# EAGLE board 8x LCD interface (EAGLE 5.01)
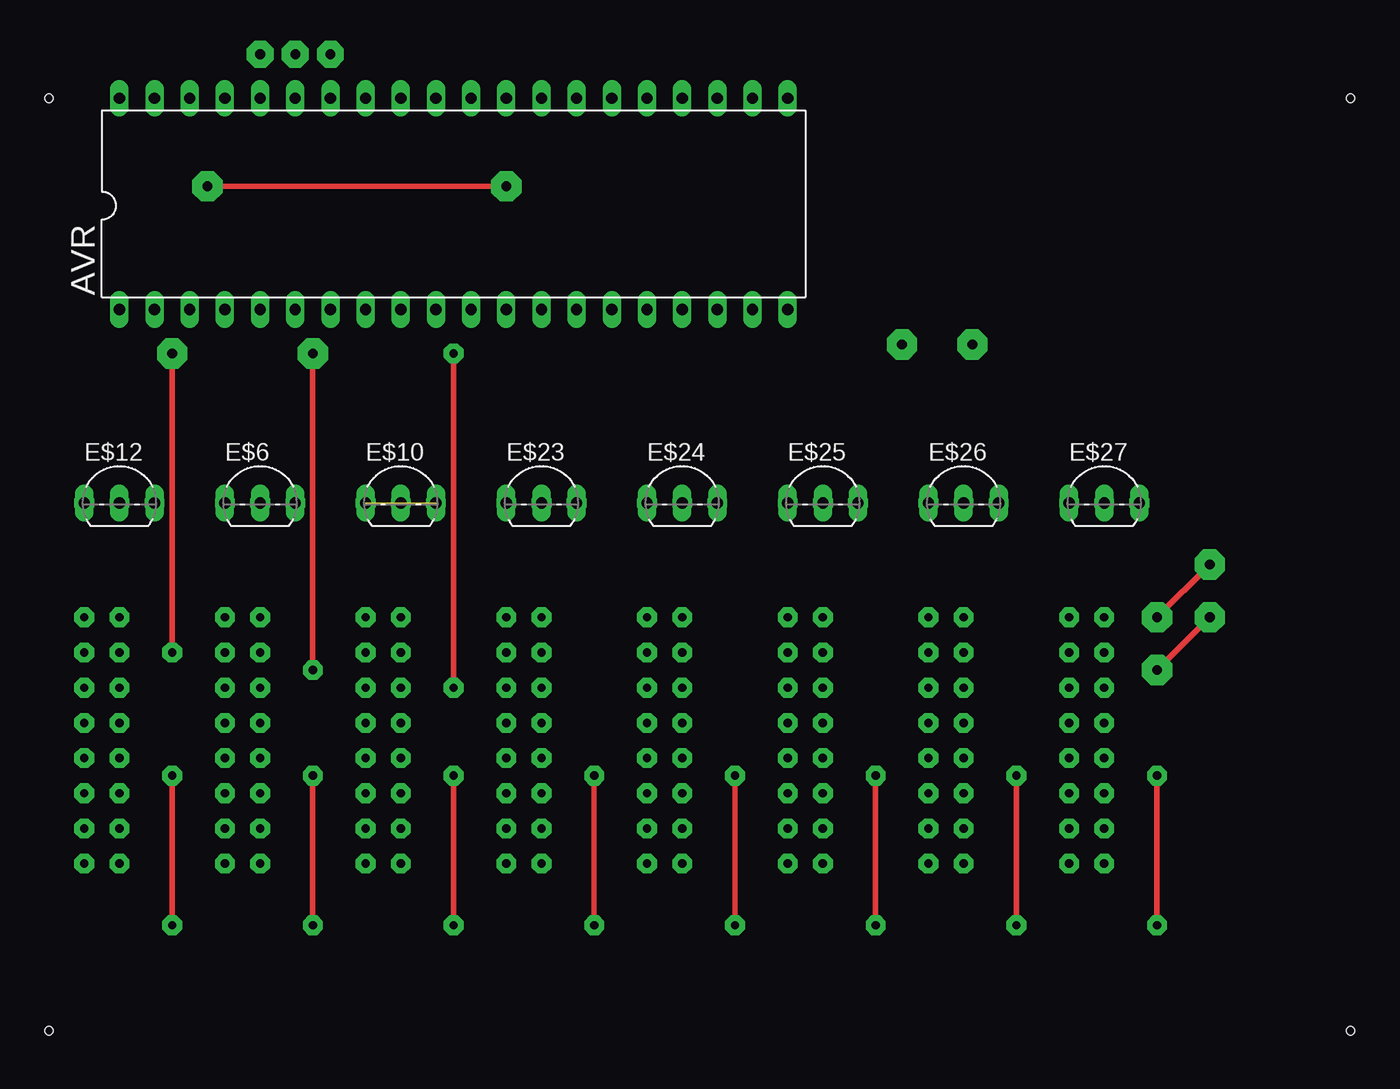
[diagram p0: board, top side]
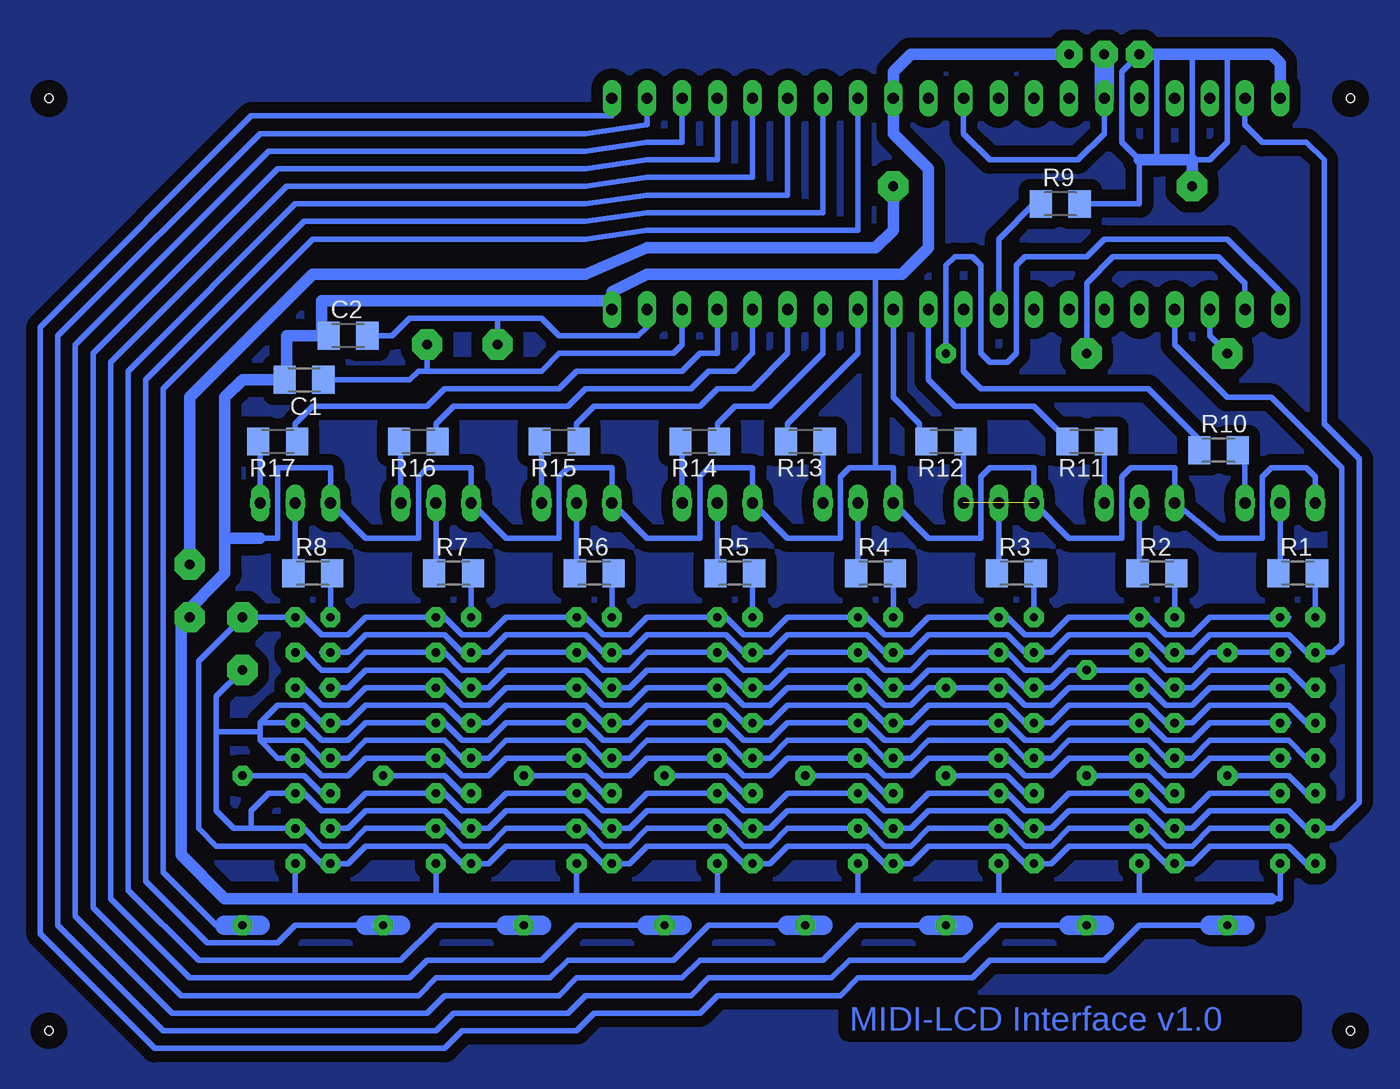
[diagram p1: board, bottom side, seen from below]

No outline drawn. Coordinates in mm, seen from the top.
Copper layers (1*16): Top 0.035mm / dielectric 1.5mm / Bottom 0.035mm
Design rules "default": minimum track width 10mil, minimum drill 24mil, track to track 32mil, track to pad 32mil, pad to pad 32mil, via to via 32mil, smd to smd 32mil, copper to edge 40mil, drill to drill 8mil, minimum pad ring 10mil, minimum via ring 8mil, stop-mask expansion 4mil, vias tented up to drill 0mil, thermal gap 10mil
Holes 0.6 mm at 0,-9.53 93.98,-9.53 93.98,57.78 0,57.78

## Footprints (pad centres in the part's own frame; a part is rotated, then mirrored left to right if it is on the bottom)
DIL40 = drill 0.813 long: 1 -24.13,-7.62; 2 -21.59,-7.62; 3 -19.05,-7.62; 4 -16.51,-7.62; 5 -13.97,-7.62; 6 -11.43,-7.62; 7 -8.89,-7.62; 8 -6.35,-7.62; 9 -3.81,-7.62; 10 -1.27,-7.62; 11 1.27,-7.62; 12 3.81,-7.62; 13 6.35,-7.62; 14 8.89,-7.62; 15 11.43,-7.62; 16 13.97,-7.62; 17 16.51,-7.62; 18 19.05,-7.62; 19 21.59,-7.62; 20 24.13,-7.62; 21 24.13,7.62; 22 21.59,7.62; 23 19.05,7.62; 24 16.51,7.62; 25 13.97,7.62; 26 11.43,7.62; 27 8.89,7.62; 28 6.35,7.62; 29 3.81,7.62; 30 1.27,7.62; 31 -1.27,7.62; 32 -3.81,7.62; 33 -6.35,7.62; 34 -8.89,7.62; 35 -11.43,7.62; 36 -13.97,7.62; 37 -16.51,7.62; 38 -19.05,7.62; 39 -21.59,7.62; 40 -24.13,7.62
M3216 = smd 1.6 x 2: 1 -1.4,0; 2 1.4,0
TO92- = drill 0.813 long: 1 2.54,0; 2 0,0; 3 -2.54,0

## Placement (x,y rotation side)
AVR  8515  [DIL40]  29.21,50.16 0 top
C1  22p  [M3216]  75.56,37.47 180 bottom
C2  22p  [M3216]  72.39,40.64 0 bottom
E$6  [TO92-]  15.24,28.57 0 top
E$10  [TO92-]  25.4,28.57 0 top
E$12  [TO92-]  5.08,28.57 0 top
E$23  [TO92-]  35.56,28.57 0 top
E$24  [TO92-]  45.72,28.57 0 top
E$25  [TO92-]  55.88,28.57 0 top
E$26  [TO92-]  66.04,28.57 0 top
E$27  [TO92-]  76.2,28.57 0 top
R1  150  [M3216]  3.81,23.5 0 bottom
R2  150  [M3216]  13.97,23.5 0 bottom
R3  150  [M3216]  24.13,23.5 0 bottom
R4  150  [M3216]  34.29,23.5 0 bottom
R5  150  [M3216]  44.45,23.5 0 bottom
R6  150  [M3216]  54.61,23.5 0 bottom
R7  150  [M3216]  64.77,23.5 0 bottom
R8  150  [M3216]  74.93,23.5 0 bottom
R9  10k  [M3216]  20.95,50.16 0 bottom
R10  470  [M3216]  9.53,32.38 0 bottom
R11  470  [M3216]  19.05,33.02 180 bottom
R12  470  [M3216]  29.21,33.02 180 bottom
R13  470  [M3216]  39.37,33.02 180 bottom
R14  470  [M3216]  46.99,33.02 180 bottom
R15  470  [M3216]  57.15,33.02 180 bottom
R16  470  [M3216]  67.31,33.02 180 bottom
R17  470  [M3216]  77.47,33.02 180 bottom

## Library data of the parts
AVR = 40xx
C1 C2 R1-R17 = rcl
E$6 E$10 E$12 E$23-E$27 = transistor-npn

## Nets
S$1: AVR.9
S$2: AVR.10
S$3: AVR.11
S$4: AVR.19
S$5: AVR.12
S$6: AVR.1
S$7: AVR.2
S$8: AVR.13
S$10: AVR.35
S$11: AVR.18
S$15: AVR.3
S$18: AVR.14
S$19: AVR.20
S$27: AVR.23
S$28: AVR.40
S$29: AVR.15
S$30: AVR.31
S$31: AVR.16
S$32: AVR.17
S$37: AVR.21
S$41: AVR.25
S$42: AVR.24
S$43: AVR.4
S$44: AVR.26
S$48: AVR.28
S$114: AVR.27
S$141: AVR.39

## Tracks (layer width: path | path; a pad name or v marks a point on that pad's centre or on a via)
S$1
  Bottom 0.406: AVR.9 25.4,47.62 22.86,50.16
S$2
  Bottom 0.406: AVR.10 27.94,38.1 26.67,36.83 14.61,36.83 10.79,33.02
S$3
  Bottom 0.406: AVR.11 30.48,37.47 28.57,35.56 22.86,35.56 20.95,33.66
S$4  (via drill 0.7 pad 2.18)
  Bottom 0.406: 61.59,41.91 v61.59,40.01 | 61.59,41.91 58.42,41.91 57.15,40.64 51.44,40.64 50.8,41.27 AVR.19 | 61.59,41.91 67.94,41.91 69.22,40.64 70.48,40.64
S$5
  Bottom 0.406: AVR.12 33.02,36.2 31.11,34.29 31.11,33.66 30.48,33.02
S$6  (via drill 0.6 pad 1.42)
  Top 0.406: v29.21,15.24 v29.21,39.37
  Bottom 0.406: v76.2,15.24 75.56,15.24 74.3,13.97 72.39,13.97 71.12,15.24 v66.04,15.24 65.41,15.24 64.14,13.97 62.23,13.97 60.96,15.24 v55.88,15.24 55.24,15.24 53.98,13.97 52.07,13.97 50.8,15.24 v45.72,15.24 45.09,15.24 43.81,13.97 41.91,13.97 40.64,15.24 34.92,15.24 33.66,13.97 31.75,13.97 30.48,15.24 v29.21,15.24 v25.4,15.24 24.77,15.24 23.5,13.97 21.59,13.97 20.32,15.24 v15.24,15.24 14.61,15.24 13.34,13.97 11.43,13.97 10.16,15.24 v5.08,15.24 4.45,15.24 | v29.21,39.37 29.21,45.72 28.57,46.35 27.3,46.35 26.67,45.72 26.67,39.37 26.04,38.73 24.77,38.73 24.13,39.37 24.13,45.72 23.5,46.35 19.05,46.35 17.78,47.62 8.89,47.62 5.08,43.81 AVR.1
S$7  (via drill 0.6 pad 1.42, 0.7 pad 2.18)
  Top 0.406: v19.05,16.51 v19.05,39.37
  Bottom 0.406: v19.05,39.37 19.05,44.45 17.14,46.35 9.53,46.35 7.62,44.45 AVR.2 | 74.3,15.24 v73.66,15.24 72.39,15.24 71.12,16.51 65.41,16.51 64.14,15.24 v63.5,15.24 62.23,15.24 60.96,16.51 55.24,16.51 53.98,15.24 v53.34,15.24 52.07,15.24 50.8,16.51 45.09,16.51 43.81,15.24 v43.18,15.24 41.91,15.24 40.64,16.51 34.92,16.51 33.66,15.24 v33.02,15.24 31.75,15.24 30.48,16.51 24.77,16.51 23.5,15.24 v22.86,15.24 21.59,15.24 20.32,16.51 v19.05,16.51 14.61,16.51 13.34,15.24 v12.7,15.24 11.43,15.24 10.16,16.51 4.45,16.51 3.17,15.24 v2.54,15.24
S$8
  Bottom 0.406: AVR.13 35.56,39.37 40.64,34.29 40.64,33.02
S$9
  pour Bottom: -16.51,69.22 106.05,69.22 106.05,-21.59 -16.51,-21.59
S$10  (via drill 0.7 pad 1.93)
  Bottom 0.813: AVR.35 v17.78,60.96
  Bottom 1.422: AVR.35 v17.78,60.96
S$11  (via drill 0.7 pad 2.18)
  Bottom 0.406: AVR.18 48.26,40.01 48.9,39.37 57.15,39.37 58.42,38.1 66.67,38.1 | 66.67,38.1 v66.67,40.01 | 74.3,37.47 67.94,37.47 67.31,38.1 66.67,38.1
S$12  (via drill 0.6 pad 1.42)
  Top 0.406: v19.05,-1.91 v19.05,8.89
  Bottom 0.406: 50.8,57.78 50.8,55.88 55.24,55.24 78.74,55.24 93.34,40.64 93.34,-1.91 85.72,-9.53 66.04,-9.53 64.77,-8.26 56.52,-8.26 55.24,-6.99 47.62,-6.99 46.35,-5.71 37.47,-5.71 36.2,-4.45 27.94,-4.45 25.4,-1.91 v19.05,-1.91 | v19.05,8.89 14.61,8.89 13.34,7.62 v12.7,7.62
S$13  (via drill 0.6 pad 1.42)
  Bottom 0.406: v7.62,28.57 7.62,33.02
S$14  (via drill 0.6 pad 1.42)
  Bottom 0.406: 80.01,16.51 81.92,14.61 81.92,12.06 | v2.54,12.7 3.17,12.7 4.45,13.97 10.16,13.97 11.43,12.7 v12.7,12.7 13.34,12.7 14.61,13.97 20.32,13.97 21.59,12.7 v22.86,12.7 23.5,12.7 24.77,13.97 30.48,13.97 31.75,12.7 v33.02,12.7 33.66,12.7 34.92,13.97 40.64,13.97 41.91,12.7 v43.18,12.7 43.81,12.7 45.09,13.97 50.8,13.97 52.07,12.7 v53.34,12.7 53.98,12.7 55.24,13.97 60.96,13.97 62.23,12.7 v63.5,12.7 64.14,12.7 65.41,13.97 71.12,13.97 72.39,12.7 v73.66,12.7 74.3,12.7 75.56,13.97 77.47,13.97 78.74,12.7 | 4.45,10.16 v5.08,10.16 10.16,10.16 11.43,8.89 13.34,8.89 14.61,10.16 v15.24,10.16 20.32,10.16 21.59,8.89 23.5,8.89 24.77,10.16 v25.4,10.16 30.48,10.16 31.75,8.89 33.66,8.89 34.92,10.16 v35.56,10.16 40.64,10.16 41.91,8.89 43.81,8.89 45.09,10.16 v45.72,10.16 50.8,10.16 52.07,8.89 53.98,8.89 55.24,10.16 v55.88,10.16 60.96,10.16 62.23,8.89 64.14,8.89 65.41,10.16 v66.04,10.16 71.12,10.16 72.39,8.89 74.3,8.89 75.56,10.16 v76.2,10.16 77.47,10.16 78.74,11.43 | 78.74,12.7 76.2,12.7 | 78.74,12.06 78.74,11.43 | 78.74,12.06 78.74,12.7 | 78.74,11.43 75.56,11.43 74.3,10.16 v73.66,10.16 72.39,10.16 71.12,11.43 65.41,11.43 64.14,10.16 v63.5,10.16 62.23,10.16 60.96,11.43 55.24,11.43 53.98,10.16 v53.34,10.16 52.07,10.16 50.8,11.43 45.09,11.43 43.81,10.16 v43.18,10.16 41.91,10.16 40.64,11.43 34.92,11.43 33.66,10.16 v33.02,10.16 31.75,10.16 30.48,11.43 24.77,11.43 23.5,10.16 v22.86,10.16 21.59,10.16 20.32,11.43 14.61,11.43 13.34,10.16 v12.7,10.16 11.43,10.16 10.16,11.43 4.45,11.43 3.17,10.16 v2.54,10.16 | v5.08,7.62 10.16,7.62 11.43,6.35 13.34,6.35 14.61,7.62 v15.24,7.62 20.32,7.62 21.59,6.35 23.5,6.35 24.77,7.62 v25.4,7.62 30.48,7.62 31.75,6.35 33.66,6.35 34.92,7.62 v35.56,7.62 40.64,7.62 41.91,6.35 43.81,6.35 45.09,7.62 v45.72,7.62 50.8,7.62 52.07,6.35 53.98,6.35 55.24,7.62 v55.88,7.62 60.96,7.62 62.23,6.35 64.14,6.35 65.41,7.62 v66.04,7.62 71.12,7.62 72.39,6.35 74.3,6.35 75.56,7.62 v76.2,7.62 78.11,7.62 79.38,6.35 79.38,5.08
  Bottom 0.406: 79.38,5.08 80.64,5.08 81.92,6.35 81.92,12.06 | 79.38,5.08 v76.2,5.08 75.56,5.08 74.3,3.81 72.39,3.81 71.12,5.08 v66.04,5.08 65.41,5.08 64.14,3.81 62.23,3.81 60.96,5.08 v55.88,5.08 55.24,5.08 53.98,3.81 52.07,3.81 50.8,5.08 v45.72,5.08 45.09,5.08 43.81,3.81 41.91,3.81 40.64,5.08 v35.56,5.08 34.92,5.08 33.66,3.81 31.75,3.81 30.48,5.08 v25.4,5.08 24.77,5.08 23.5,3.81 21.59,3.81 20.32,5.08 v15.24,5.08 14.61,5.08 13.34,3.81 11.43,3.81 10.16,5.08 v5.08,5.08 | 81.92,12.06 78.74,12.06
S$15  (via drill 0.6 pad 1.42, 0.7 pad 2.18)
  Top 0.406: v8.89,17.78 v8.89,39.37
  Bottom 0.406: v76.2,17.78 75.56,17.78 74.3,16.51 72.39,16.51 71.12,17.78 v66.04,17.78 65.41,17.78 64.14,16.51 62.23,16.51 60.96,17.78 55.24,17.78 53.98,16.51 52.07,16.51 50.8,17.78 v45.72,17.78 45.09,17.78 43.81,16.51 41.91,16.51 40.64,17.78 v35.56,17.78 34.92,17.78 33.66,16.51 31.75,16.51 30.48,17.78 v25.4,17.78 24.77,17.78 23.5,16.51 21.59,16.51 20.32,17.78 v15.24,17.78 14.61,17.78 13.34,16.51 11.43,16.51 10.16,17.78 v8.89,17.78 v5.08,17.78 4.45,17.78 | AVR.3 10.16,40.64 v8.89,39.37
S$16
  Bottom 1.422: 17.78,-1.91 20.32,-1.91
S$17  (via drill 0.6 pad 1.42)
  Bottom 0.406: v2.54,20.32 2.54,22.86
S$18
  Bottom 0.406: 45.72,33.02 45.72,34.29 44.45,35.56 41.91,35.56 38.1,39.37 AVR.14
S$19  (via drill 0.6 pad 1.42, 0.7 pad 1.93)
  Bottom 0.406: 26.04,60.96 25.4,60.96 | v2.54,28.57 2.54,30.48 3.17,31.11 5.71,31.11 6.35,30.48 6.35,26.04 9.53,26.04 v12.7,28.57 12.7,31.11 15.88,31.11 16.51,30.48 16.51,26.04 20.32,26.04 22.86,28.57 22.86,31.11 26.04,31.11 26.67,30.48 26.67,26.04 30.48,26.04 v33.02,28.57 33.02,31.11 34.29,31.11 | 34.29,31.11 36.2,31.11 36.83,30.48 36.83,26.04 40.64,26.04 v43.18,28.57 43.18,31.11 46.35,31.11 46.99,30.48 46.99,26.04 50.8,26.04 v53.34,28.57 53.34,31.11 56.52,31.11 57.15,30.48 57.15,26.04 60.96,26.04 v63.5,28.57 63.5,31.11 66.67,31.11 67.31,30.48 67.31,26.04 71.12,26.04 v73.66,28.57 73.66,31.11 77.47,31.11 77.47,26.04 78.74,26.04 | 34.29,45.09 34.29,31.11 | 45.72,0 v45.72,2.54 | 55.88,0 45.72,0 | 55.88,0 v55.88,2.54 | 66.04,0 55.88,0 | 66.04,0 v66.04,2.54 | 35.56,0 v35.56,2.54 | 35.56,0 45.72,0 | 25.4,0 v25.4,2.54 | 25.4,0 35.56,0 | 76.2,0 66.04,0 | 76.2,0 v76.2,2.54 | 81.28,0 76.2,0 | 15.24,0 v15.24,2.54 | 15.24,0 25.4,0 | v5.08,2.54 5.08,0 5.71,0 15.24,0
  Bottom 0.813: 25.4,60.96 24.77,60.96 | 24.77,60.96 26.04,60.96 31.75,60.96 33.02,59.69 33.02,55.24 30.48,52.7 30.48,46.99 32.38,45.09 34.29,45.09 50.8,45.09 53.34,43.81 53.34,43.18 | 24.77,60.96 v20.32,60.96 | 53.34,43.18 AVR.20 | 53.34,43.18 74.3,43.18 74.3,40.64 76.83,40.64 76.83,37.47 80.01,37.47 81.28,36.2 81.28,26.04 | 81.28,26.04 78.74,26.04 | 81.28,26.04 81.28,23.5 84.45,20.32 84.45,3.17 81.28,0 5.71,0
S$20  (via drill 0.6 pad 1.42)
  Bottom 0.406: v12.7,20.32 12.7,22.86
S$21  (via drill 0.6 pad 1.42)
  Bottom 0.406: v17.78,28.57 17.78,32.38
S$22  (via drill 0.6 pad 1.42)
  Bottom 0.406: 5.08,24.13 v5.08,28.57
S$23  (via drill 0.6 pad 1.42)
  Bottom 0.406: v22.86,20.32 22.86,22.86
S$24  (via drill 0.6 pad 1.42)  (1 unrouted)
  Bottom 0.406: v27.94,28.57 27.94,32.38
  other vias: 22.86,28.57
S$25  (via drill 0.6 pad 1.42)
  Bottom 0.406: 15.24,24.13 v15.24,28.57
S$26  (via drill 0.6 pad 1.42)
  Bottom 0.406: 25.4,24.13 v25.4,28.57
S$27  (via drill 0.6 pad 1.42)
  Top 0.406: v29.21,-1.91 v29.21,8.89
  Bottom 0.406: v29.21,8.89 24.77,8.89 23.5,7.62 v22.86,7.62 | v29.21,-1.91 35.56,-1.91 38.1,-4.45 46.99,-4.45 48.26,-5.71 55.88,-5.71 57.15,-6.99 65.41,-6.99 66.67,-8.26 85.09,-8.26 92.08,-1.27 92.08,40.01 78.11,53.98 55.24,53.98 50.8,54.61 48.26,54.61 AVR.23
S$28  (via drill 0.7 pad 1.93)
  Bottom 0.406: 19.68,50.16 15.24,50.16 15.24,53.34 16.51,54.61 16.51,59.69 v15.24,60.96 | 13.97,60.96 13.97,53.34 | 11.43,60.96 11.43,53.34 10.16,53.34 8.89,54.61 8.89,60.96 | 5.71,60.96 8.26,60.96 | 5.08,60.33 5.08,58.42
  Bottom 0.813: 15.24,53.34 13.97,53.34 11.43,53.34 11.43,51.44 | v15.24,60.96 13.97,60.96 11.43,60.96 8.89,60.96 5.71,60.96 5.08,60.33 AVR.40
S$29
  Bottom 0.406: 55.88,33.02 55.88,34.29 54.61,35.56 46.99,35.56 45.72,36.83 43.18,36.83 40.64,39.37 AVR.15
S$30
  Bottom 0.406: AVR.31 27.94,55.24 26.04,53.34 19.68,53.34 17.78,55.24 17.78,56.52
S$31
  Bottom 0.406: 66.04,33.02 66.04,34.29 64.77,35.56 56.52,35.56 55.24,36.83 47.62,36.83 46.35,38.1 44.45,38.1 43.18,39.37 AVR.16
S$32
  Bottom 0.406: 76.2,33.02 76.2,34.29 74.93,35.56 66.67,35.56 65.41,36.83 57.15,36.83 55.88,38.1 48.26,38.1 46.99,39.37 45.72,39.37 AVR.17
S$33  (via drill 0.7 pad 2.18)
  Top 0.406: v80.01,16.51 v83.82,20.32
S$34  (via drill 0.6 pad 1.42, 0.7 pad 2.18)
  Top 0.406: v80.01,20.32 v83.82,24.13
  Bottom 0.406: 4.45,20.32 v5.08,20.32 10.16,20.32 11.43,19.05 13.34,19.05 14.61,20.32 v15.24,20.32 20.32,20.32 21.59,19.05 23.5,19.05 24.77,20.32 v25.4,20.32 30.48,20.32 31.75,19.05 33.66,19.05 34.92,20.32 v35.56,20.32 40.64,20.32 41.91,19.05 43.81,19.05 45.09,20.32 v45.72,20.32 50.8,20.32 52.07,19.05 53.98,19.05 55.24,20.32 v55.88,20.32 60.96,20.32 62.23,19.05 64.14,19.05 65.41,20.32 v66.04,20.32 71.12,20.32 72.39,19.05 74.3,19.05 75.56,20.32 v76.2,20.32 v80.01,20.32 83.19,17.14 83.19,5.08 81.92,3.81 75.56,3.81 74.3,2.54 v73.66,2.54 72.39,2.54 71.12,3.81 65.41,3.81 64.14,2.54 v63.5,2.54 62.23,2.54 60.96,3.81 55.24,3.81 53.98,2.54 v53.34,2.54 52.07,2.54 50.8,3.81 45.09,3.81 43.81,2.54 v43.18,2.54 41.91,2.54 40.64,3.81 34.92,3.81 33.66,2.54 v33.02,2.54 31.75,2.54 30.48,3.81 24.77,3.81 23.5,2.54 v22.86,2.54 21.59,2.54 20.32,3.81 14.61,3.81 13.34,2.54 v12.7,2.54 11.43,2.54 10.16,3.81 4.45,3.81 3.17,2.54 v2.54,2.54
  Bottom 0.813: 33.02,51.44 33.02,48.26 34.29,46.99 50.8,46.99 55.24,45.09 74.93,45.09 83.82,36.2 v83.82,24.13
S$35  (via drill 0.6 pad 1.42)
  Bottom 0.406: v76.2,12.7 75.56,12.7 74.3,11.43 72.39,11.43 71.12,12.7 v66.04,12.7 65.41,12.7 64.14,11.43 62.23,11.43 60.96,12.7 v55.88,12.7 55.24,12.7 53.98,11.43 52.07,11.43 50.8,12.7 v45.72,12.7 45.09,12.7 43.81,11.43 41.91,11.43 40.64,12.7 v35.56,12.7 34.92,12.7 33.66,11.43 31.75,11.43 30.48,12.7 v25.4,12.7 24.77,12.7 23.5,11.43 21.59,11.43 20.32,12.7 v15.24,12.7 14.61,12.7 13.34,11.43 11.43,11.43 10.16,12.7 v5.08,12.7 4.45,12.7
S$36
  Top 0.406: 11.43,51.44 33.02,51.44
S$37  (via drill 0.6 pad 1.42)
  Top 0.406: v8.89,-1.91 v8.89,8.89
  Bottom 0.406: AVR.21 53.34,56.52 79.38,56.52 94.61,41.27 94.61,-2.54 86.36,-10.79 65.41,-10.79 64.14,-9.53 55.88,-9.53 54.61,-8.26 46.99,-8.26 45.72,-6.99 36.83,-6.99 35.56,-5.71 27.3,-5.71 26.04,-4.45 17.78,-4.45 15.24,-1.91 10.16,-1.91 | v2.54,7.62 3.17,7.62 4.45,8.89 v8.89,8.89
  Bottom 1.422: 7.62,-1.91 10.16,-1.91 v8.89,-1.91
S$38
  Bottom 1.422: 27.94,-1.91 30.48,-1.91
S$39
  Bottom 1.422: 38.1,-1.91 40.64,-1.91
S$40
  Bottom 1.422: 48.26,-1.91 50.8,-1.91
S$41  (via drill 0.6 pad 1.42)
  Top 0.406: v49.53,-1.91 v49.53,8.89 v49.53,-1.91
  Bottom 0.406: v49.53,-1.91 55.88,-1.91 58.42,-4.45 66.67,-4.45 67.94,-5.71 83.82,-5.71 89.53,0 89.53,38.73 76.83,51.44 55.24,51.44 50.8,52.07 43.18,52.07 AVR.25 | v49.53,8.89 45.09,8.89 43.81,7.62 v43.18,7.62
S$42  (via drill 0.6 pad 1.42)
  Top 0.406: v39.37,-1.91 v39.37,8.89
  Bottom 0.406: AVR.24 45.72,53.34 50.8,53.34 55.24,52.7 77.47,52.7 90.81,39.37 90.81,-0.64 84.45,-6.99 67.31,-6.99 66.04,-5.71 57.78,-5.71 56.52,-4.45 48.9,-4.45 46.35,-1.91 v39.37,-1.91 | v39.37,8.89 34.92,8.89 33.66,7.62 v33.02,7.62
S$43  (via drill 0.6 pad 1.42)
  Bottom 0.406: 74.3,17.78 v73.66,17.78 72.39,17.78 71.12,19.05 65.41,19.05 64.14,17.78 v63.5,17.78 62.23,17.78 60.96,19.05 55.24,19.05 53.98,17.78 v53.34,17.78 52.07,17.78 50.8,19.05 45.09,19.05 43.81,17.78 v43.18,17.78 41.91,17.78 40.64,19.05 34.92,19.05 33.66,17.78 v33.02,17.78 31.75,17.78 30.48,19.05 24.77,19.05 23.5,17.78 v22.86,17.78 21.59,17.78 20.32,19.05 14.61,19.05 13.34,17.78 v12.7,17.78 11.43,17.78 10.16,19.05 4.45,19.05 3.17,17.78 v2.54,17.78 1.27,17.78 0.64,18.41 0.64,31.11 5.71,36.2 8.89,36.2 12.7,40.01 AVR.4
S$44  (via drill 0.6 pad 1.42)
  Top 0.406: v59.69,-1.91 v59.69,8.89 v59.69,-1.91
  Bottom 0.406: AVR.26 40.64,50.8 50.8,50.8 55.24,50.16 76.2,50.16 88.27,38.1 88.27,0.64 83.19,-4.45 68.58,-4.45 66.04,-1.91 v59.69,-1.91 | v59.69,8.89 55.24,8.89 53.98,7.62 v53.34,7.62
S$45
  Bottom 1.422: 78.74,-1.91 81.28,-1.91
S$46
  Bottom 1.422: 58.42,-1.91 60.96,-1.91
S$47  (via drill 0.6 pad 1.42)
  Bottom 0.406: v43.18,20.32 43.18,23.5
S$48  (via drill 0.6 pad 1.42)
  Top 0.406: v80.01,-1.91 v80.01,8.89 v80.01,-1.91
  Bottom 0.406: v73.66,7.62 74.3,7.62 75.56,8.89 v80.01,8.89 | v80.01,-1.91 81.92,-1.91 85.72,1.91 85.72,36.83 74.93,47.62 55.24,47.62 50.8,48.26 35.56,48.26 AVR.28
S$49
  Bottom 1.422: 68.58,-1.91 71.12,-1.91
S$50  (via drill 0.7 pad 2.18)
  other vias: 33.02,51.44
S$51  (via drill 0.7 pad 2.18)
  other vias: 11.43,51.44
S$61  (via drill 0.6 pad 1.42)
  Bottom 0.406: v53.34,20.32 53.34,23.5
S$63  (via drill 0.6 pad 1.42)
  other vias: 55.88,17.78
S$75  (via drill 0.6 pad 1.42)
  Bottom 0.406: v63.5,20.32 63.5,23.5
S$92  (via drill 0.6 pad 1.42)
  Bottom 0.406: v73.66,20.32 73.66,23.5
S$101  (via drill 0.6 pad 1.42)
  other vias: 35.56,15.24
S$104  (via drill 0.6 pad 1.42)
  Bottom 0.406: v33.02,20.32 33.02,23.5
S$114  (via drill 0.6 pad 1.42)
  Top 0.406: v69.85,-1.91 v69.85,8.89 v69.85,-1.91
  Bottom 0.406: v69.85,-1.91 76.2,-1.91 77.47,-3.17 82.55,-3.17 87,1.27 87,37.47 75.56,48.9 55.24,48.9 50.8,49.53 38.1,49.53 AVR.27 | v63.5,7.62 64.14,7.62 65.41,8.89 v69.85,8.89
S$121  (via drill 0.6 pad 1.42)
  Bottom 0.406: 35.56,23.5 v35.56,28.57
S$123  (via drill 0.6 pad 1.42)
  Bottom 0.406: v38.1,28.57 38.1,33.02
S$124  (via drill 0.6 pad 1.42)
  Bottom 0.406: 45.72,23.5 v45.72,28.57
S$126  (via drill 0.6 pad 1.42)
  Bottom 0.406: v48.26,28.57 48.26,33.02
S$128  (via drill 0.6 pad 1.42)
  Bottom 0.406: 55.88,23.5 v55.88,28.57
S$129  (via drill 0.6 pad 1.42)
  Bottom 0.406: v58.42,28.57 58.42,33.02
S$131  (via drill 0.6 pad 1.42)
  Bottom 0.406: 66.04,23.5 v66.04,28.57
S$132  (via drill 0.6 pad 1.42)
  Bottom 0.406: v68.58,28.57 68.58,33.02
S$134  (via drill 0.6 pad 1.42)
  Bottom 0.406: 76.83,23.5 76.2,23.5 v76.2,28.57
S$135  (via drill 0.6 pad 1.42)
  Bottom 0.406: v78.74,28.57 78.74,33.02
S$141  (via drill 0.6 pad 1.42)
  Bottom 0.406: v73.66,5.08 72.39,5.08 71.12,6.35 65.41,6.35 64.14,5.08 v63.5,5.08 62.23,5.08 60.96,6.35 55.24,6.35 53.98,5.08 v53.34,5.08 52.07,5.08 50.8,6.35 45.09,6.35 43.81,5.08 v43.18,5.08 41.91,5.08 40.64,6.35 34.92,6.35 33.66,5.08 v33.02,5.08 31.75,5.08 30.48,6.35 24.77,6.35 23.5,5.08 v22.86,5.08 21.59,5.08 20.32,6.35 14.61,6.35 13.34,5.08 v12.7,5.08 11.43,5.08 10.16,6.35 4.45,6.35 3.17,5.08 v2.54,5.08 1.27,5.08 -0.64,6.99 -0.64,31.75 1.91,34.29 1.91,53.34 3.17,54.61 6.35,54.61 7.62,55.88 AVR.39

## Text on the board
Bottom: MIDI-LCD Interface v1.0
tValues: X 8MHz